# EAGLE board relay brd (EAGLE 7.5.0)
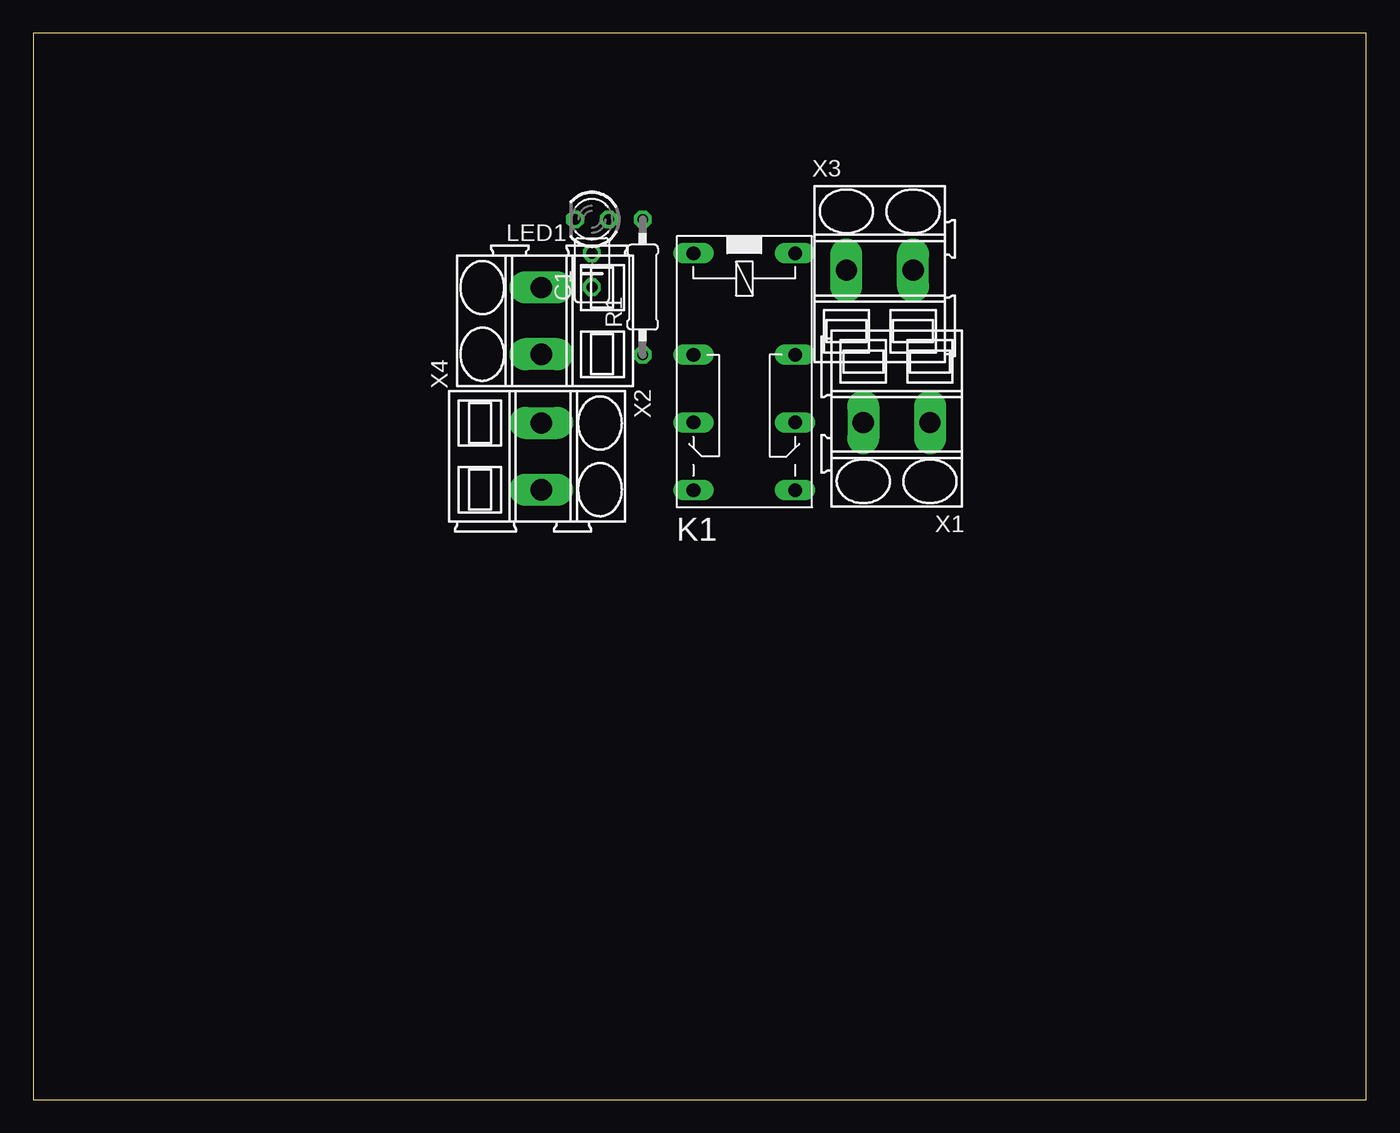
[diagram p0: board, top side]
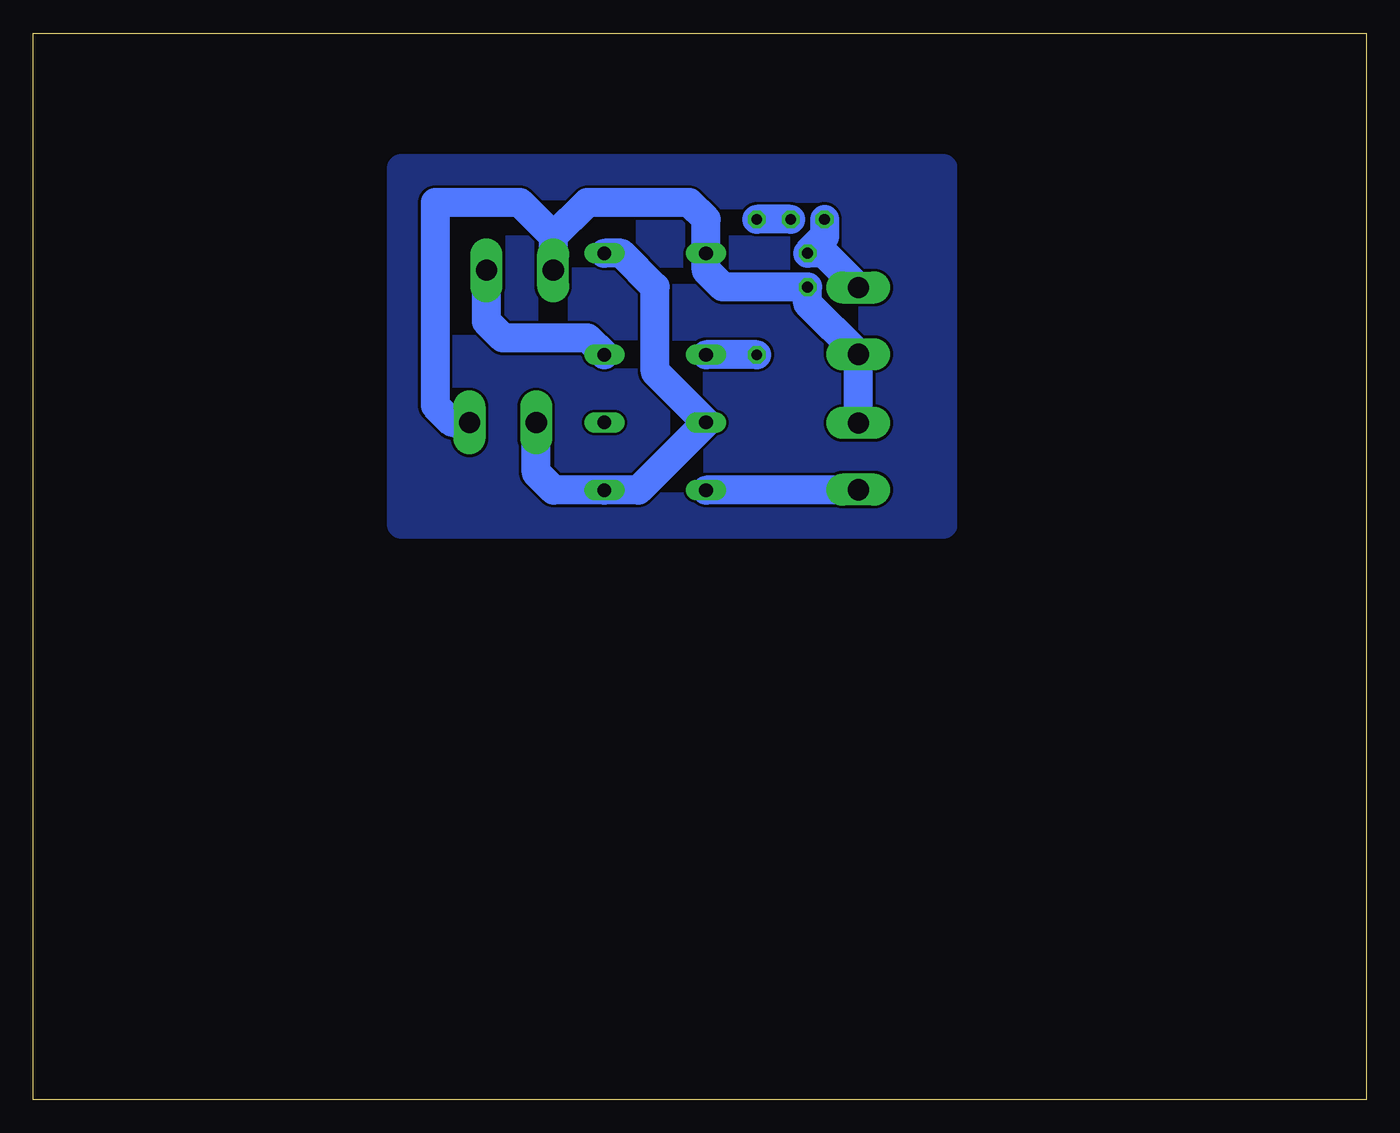
[diagram p1: board, bottom side, seen from below]

Size 100 x 80 mm. Coordinates in mm from the lower left corner, seen from the top.
Outline: 0,0 100,0 100,80 0,80 0,0
Copper layers (1*16): Top 0.035mm / dielectric 1.5mm / Bottom 0.035mm
Design rules "default": minimum track width 10mil, minimum drill 24mil, track to track 8mil, track to pad 8mil, pad to pad 8mil, via to via 8mil, smd to smd 8mil, copper to edge 40mil, drill to drill 8mil, minimum pad ring 10mil, minimum via ring 8mil, stop-mask expansion 4mil, vias tented up to drill 0mil, thermal gap 10mil

## Footprints (pad centres in the part's own frame; a part is rotated, then mirrored left to right if it is on the bottom)
C025-025X050 = drill 0.813 octagon: 1 -1.27,0; 2 1.27,0
351 = drill 1.016 long: 1 -3.81,-3.81; 16 -3.81,3.81; O1 8.89,-3.81; O2 8.89,3.81; P1 3.81,-3.81; P2 3.81,3.81; S1 13.97,-3.81; S2 13.97,3.81
LED3MM = drill 0.813 octagon: A -1.27,0; K 1.27,0
0207/10 = drill 0.813 octagon: 1 -5.08,0; 2 5.08,0
SMKDSP_1,5/2 = drill 1.6 pad 1.8 long: 1 -2.5,0; 2 2.5,0

## Placement (x,y rotation side)
C1  [C025-025X050]  41.91,62.23 90 top
K1  351  [351]  53.34,59.69 270 top
LED1  [LED3MM]  41.91,66.04 180 top
R1  [0207/10]  45.72,60.96 90 top
X1  SMKDSP_1,5/2  [SMKDSP_1,5/2]  64.77,50.8 180 top
X2  SMKDSP_1,5/2  [SMKDSP_1,5/2]  38.1,48.26 270 top
X3  SMKDSP_1,5/2  [SMKDSP_1,5/2]  63.5,62.23 0 top
X4  SMKDSP_1,5/2  [SMKDSP_1,5/2]  38.1,58.42 90 top

## Library data of the parts
C1 = rcl; SPICEPREFIX: C
K1 = relay; OC_FARNELL: unknown; OC_NEWARK: unknown
LED1 = led
R1 = rcl; SPICEPREFIX: R
X1-X4 = con-phoenix-smkdsp; MF: FARNELL; MPN: 1733570; OC_FARNELL: 3041244; OC_NEWARK: 69C8588

## Nets
GND: C1.1 K1.1 X1.1 X2.1 X3.1 X4.1
N$1: K1.P1 R1.1
N$2: LED1.A R1.2
O1: K1.S1 X2.2
P2: K1.P2 X3.2
S12: K1.16 K1.O1 K1.S2 X1.2
VOUT: C1.2 LED1.K X4.2

## Tracks (layer width: path | path; a pad name or v marks a point on that pad's centre or on a via)
GND
  Bottom 2.184: 60.96,64.77 58.42,67.31 50.8,67.31 49.53,66.04 K1.1 49.53,62.23 48.26,60.96 C1.1 41.91,59.73 X4.1 X2.1 | 60.96,64.77 61,64.73 X3.1 60.96,62.27 60.96,64.77 | 60.96,64.77 63.5,67.31 69.85,67.31 69.85,52.07 68.58,50.8 X1.1
N$1
  Bottom 2.184: R1.1 K1.P1
N$2
  Bottom 2.184: LED1.A R1.2
N$3
  pour Bottom: 31.75,69.85 72.39,69.85 72.39,43.18 31.75,43.18
O1
  Bottom 2.184: X2.2 38.14,45.72 K1.S1
P2
  Bottom 2.184: K1.P2 58.42,57.15 64.77,57.15 66,58.38 X3.2
S12
  Bottom 2.184: K1.16 55.88,63.5 53.34,60.96 53.34,54.61 K1.O1 54.61,45.72 K1.S2 60.96,45.72 62.27,47.03 X1.2
VOUT
  Bottom 2.184: X4.2 40.68,63.5 C1.2 40.64,64.77 LED1.K